# EAGLE board OBCv4 (EAGLE 9.6.2)
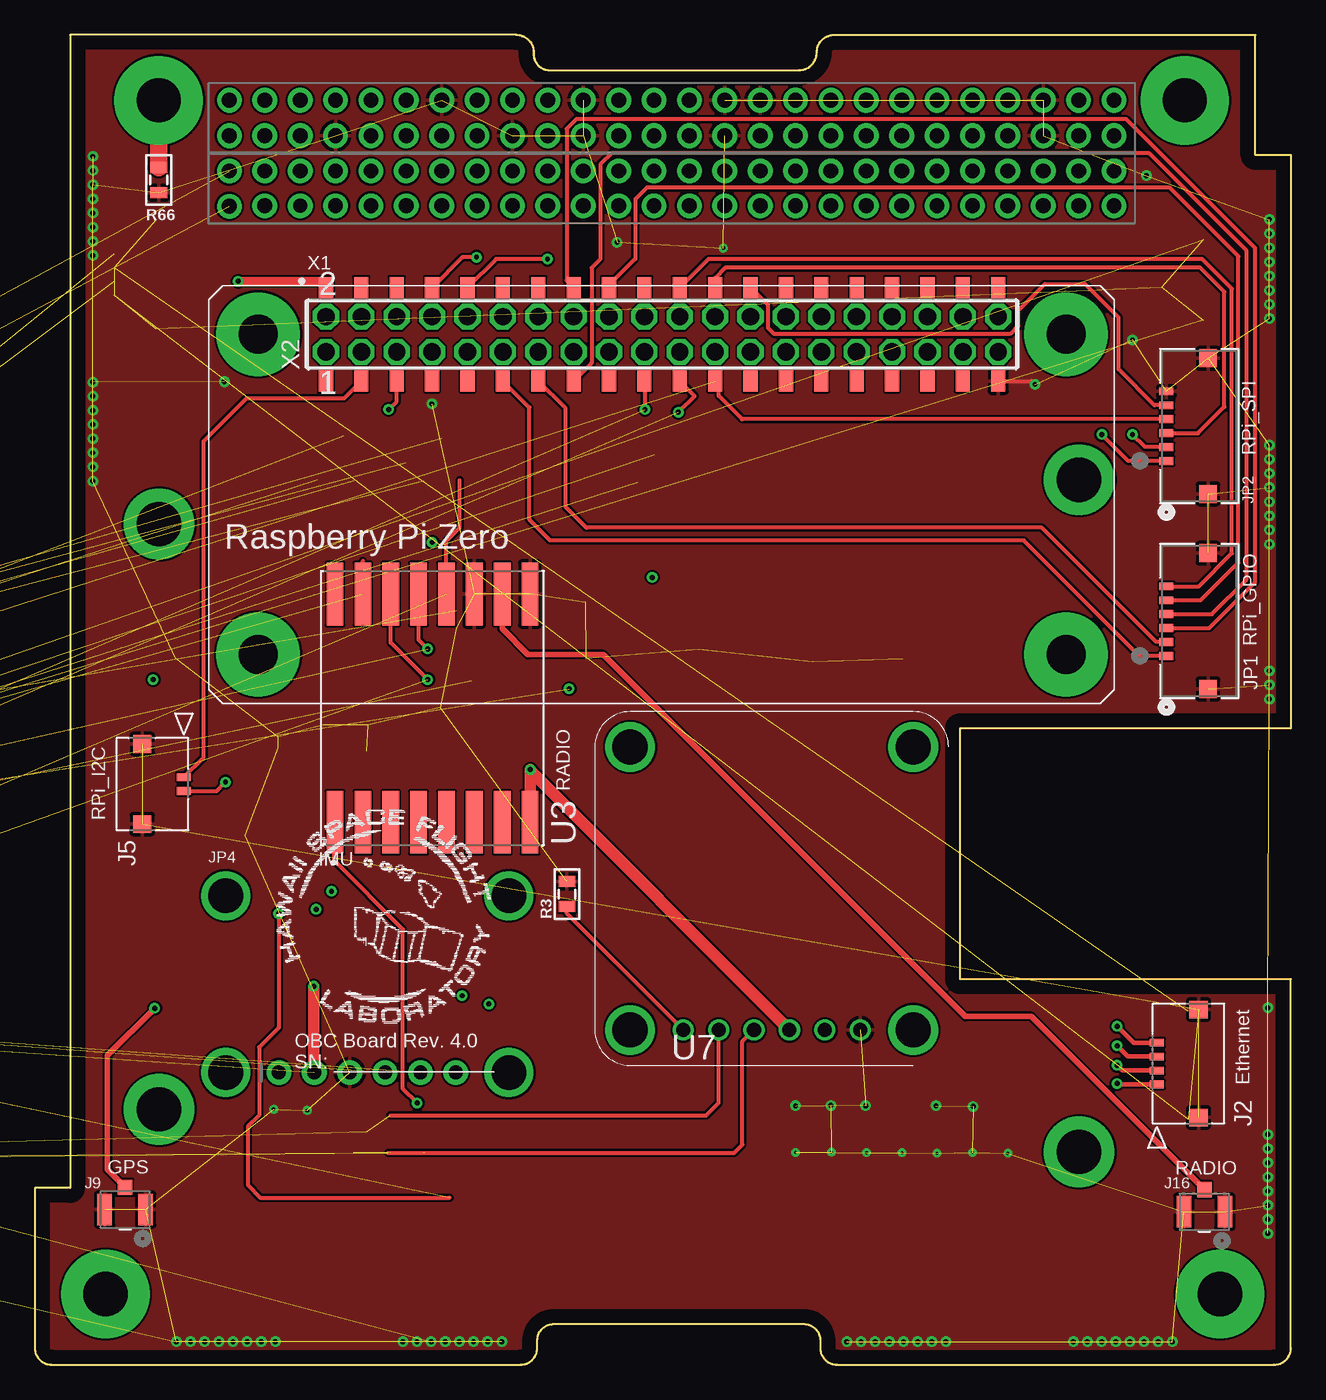
[diagram p0: board, top side]
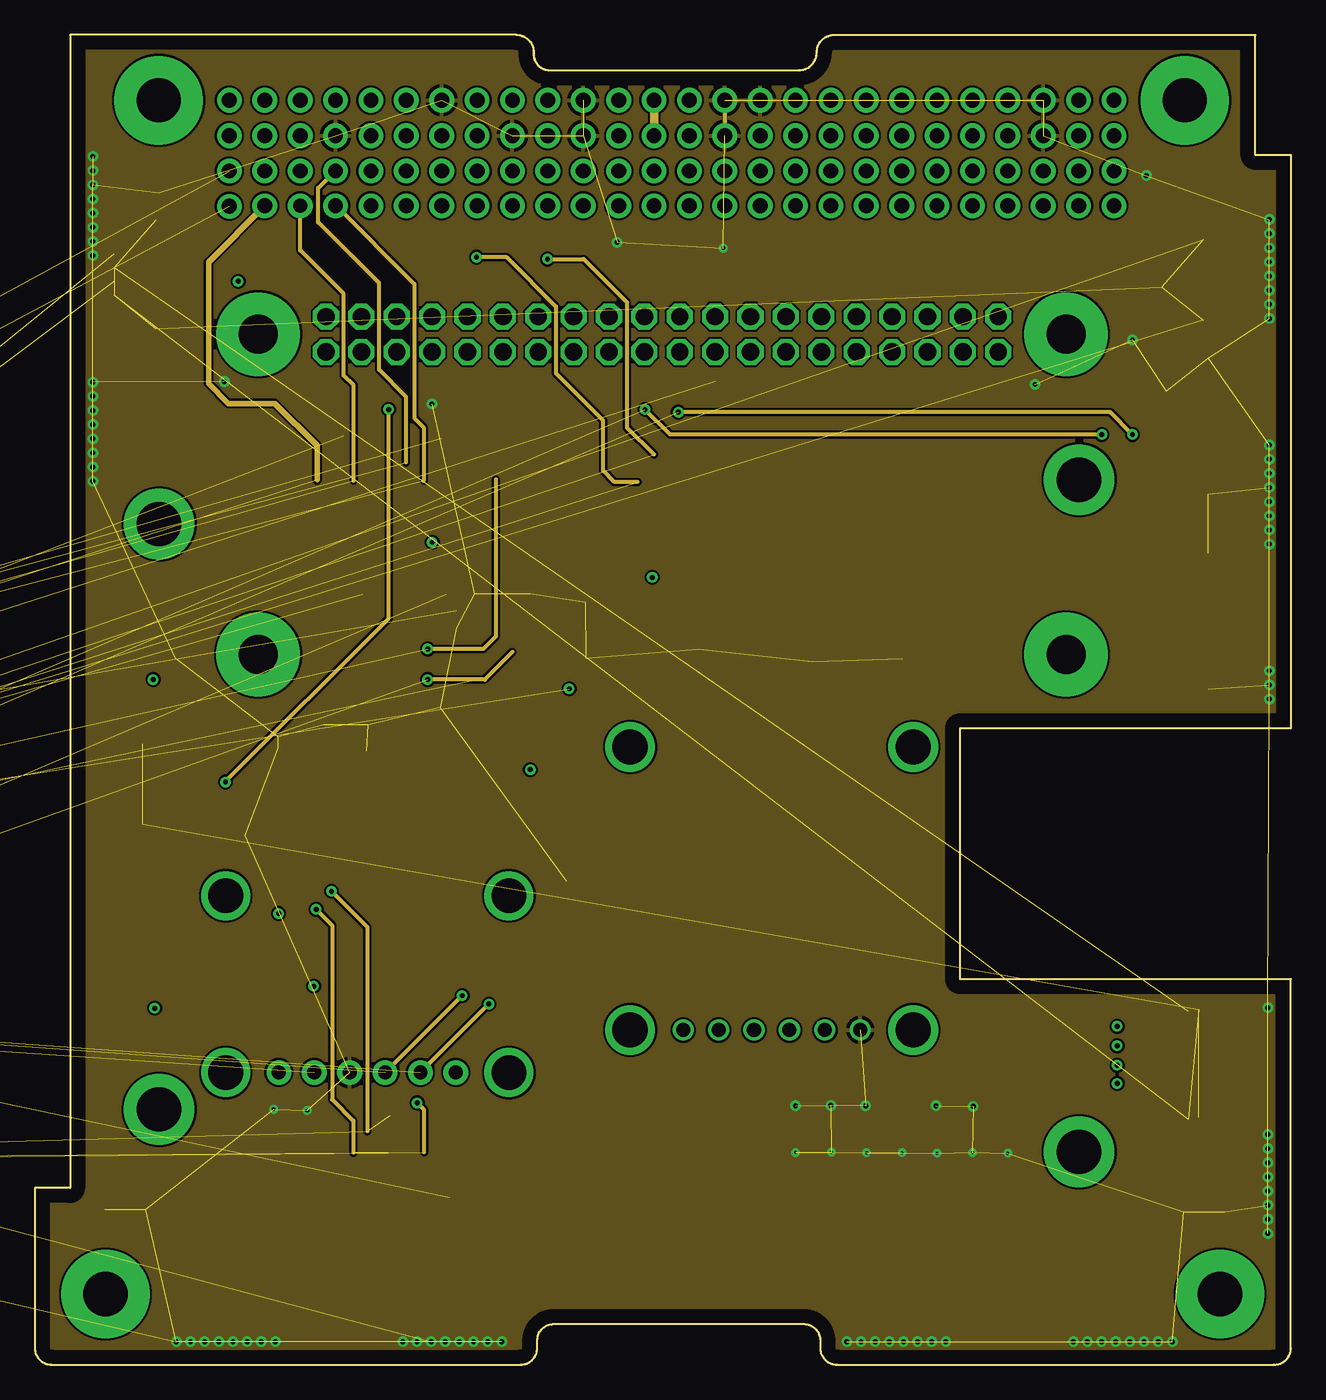
[diagram p1: board, inner layer Route2]
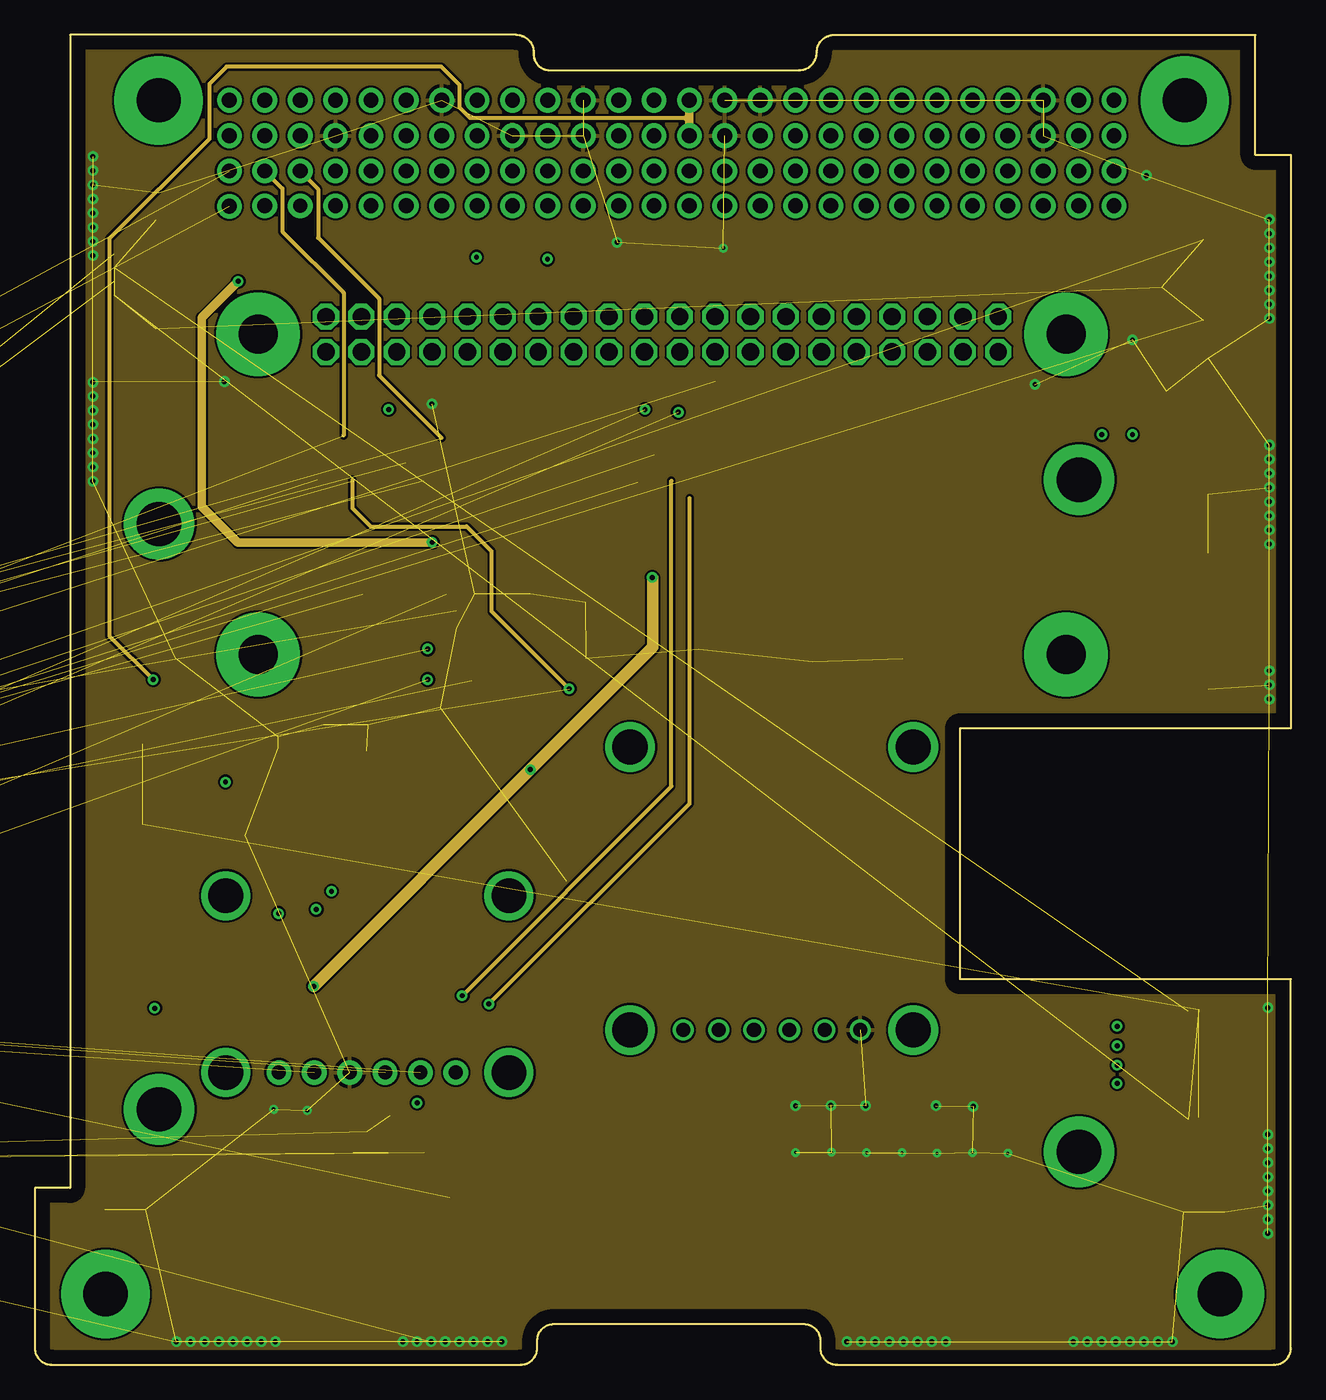
[diagram p2: board, inner layer Route15]
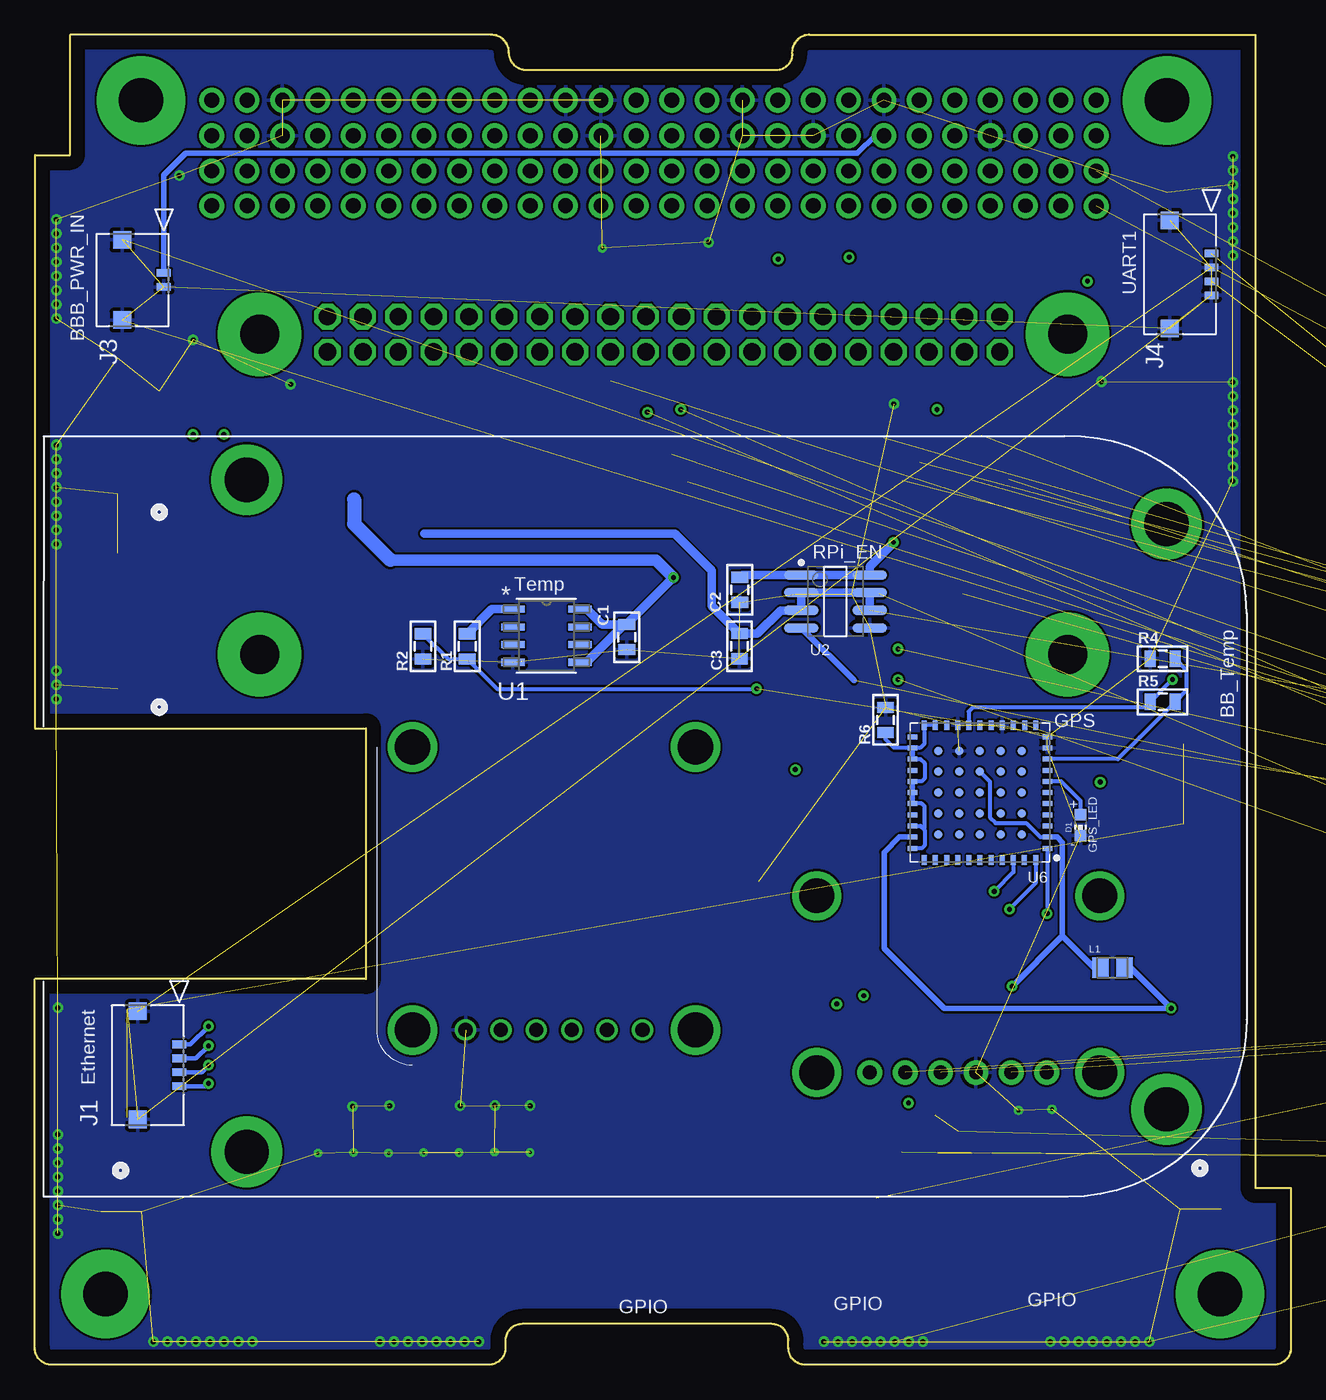
[diagram p3: board, bottom side, seen from below]

Size 90.17 x 95.5 mm. Coordinates in mm from the lower left corner, seen from the top.
Copper layers (1+2*15+16): Top 0.035mm / dielectric 1.5mm / Route2 0.035mm / dielectric 0.15mm / Route15 0.035mm / dielectric 0.2mm / Bottom 0.035mm
Design rules "default *": minimum track width 6mil, minimum drill 8mil, track to track 6mil, track to pad 6mil, pad to pad 6mil, via to via 6mil, smd to smd 6mil, copper to edge 40mil, drill to drill 6mil, minimum pad ring 10mil, minimum via ring 8mil, stop-mask expansion 4mil, vias tented up to drill 0mil, thermal gap 10mil
Net classes: 1 highpower: width 0.406 mm, drill 0.483 mm; 2 lowpower: width 0.305 mm, drill 0.483 mm

## Footprints (pad centres in the part's own frame; a part is rotated, then mirrored left to right if it is on the bottom)
0805 = smd 0.8 x 1.2: 1 -0.9,0; 2 0.9,0
CHIP-LED0603 = smd 0.8 x 0.8: A 0,-0.75; C 0,0.75
PC104_WCONN = drill 1.067 pad 1.778: 1.1 13.97,83.185; 1.2 13.97,85.725; 1.3 16.51,83.223; 1.4 16.51,85.725; 1.6 19.05,85.725; 1.7 21.59,83.223; 1.8 21.59,85.725; 1.9 24.13,83.223; 1.10 24.13,85.725; 1.11 26.67,83.223; 1.12 26.67,85.725; 1.13 29.21,83.223; 1.14 29.21,85.725; 1.15 31.75,83.223; 1.16 31.75,85.725; 1.17 34.29,83.223; 1.18 34.29,85.725; 1.19 36.83,83.223; 1.20 36.83,85.725; 1.21 39.37,83.223; 1.22 39.37,85.725; 1.23 41.91,83.223; 1.24 41.91,85.725; 1.25 44.45,83.223; 1.26 44.45,85.725; 1.27 46.99,83.223; 1.28 46.99,85.725; 1.29 49.53,83.223; 1.30 49.53,85.725; 1.31 52.07,83.223; 1.32 52.07,85.725; 1.33 54.61,83.223; 1.34 54.61,85.725; 1.35 57.15,83.223; 1.36 57.15,85.725; 1.37 59.69,83.223; 1.38 59.69,85.725; 1.39 62.23,83.223; 1.40 62.23,85.725; 1.41 64.77,83.223; 1.42 64.77,85.725; 1.43 67.31,83.223; 1.44 67.31,85.725; 1.45 69.85,83.223; 1.46 69.85,85.725; 1.47 72.39,83.223; 1.48 72.39,85.725; 1.49 74.93,83.223; 1.50 74.93,85.725; 1.51 77.47,83.223; 1.52 77.47,85.725; 2.1 13.97,88.265; 2.2 13.97,90.805; 2.3 16.51,88.265; 2.4 16.51,90.805; 2.5 19.05,88.265; 2.6 19.05,90.805; 2.7 21.59,88.265; 2.8 21.59,90.805; 2.9 24.13,88.265; 2.10 24.13,90.805; 2.11 26.67,88.265; 2.12 26.67,90.805; 2.13 29.21,88.265; 2.14 29.21,90.805; 2.15 31.75,88.265; 2.16 31.75,90.805; 2.17 34.29,88.265; 2.18 34.29,90.805; 2.19 36.83,88.265; 2.20 36.83,90.805; 2.21 39.37,88.265; 2.22 39.37,90.805; 2.23 41.91,88.265; 2.24 41.91,90.805; 2.25 44.45,88.265; 2.26 44.45,90.805; 2.27 46.99,88.265; 2.28 46.99,90.805; 2.29 49.53,88.265; 2.30 49.53,90.805; 2.31 52.07,88.265; 2.32 52.07,90.805; 2.33 54.61,88.265; 2.34 54.61,90.805; 2.35 57.15,88.265; 2.36 57.15,90.805; 2.37 59.69,88.265; 2.38 59.69,90.805; 2.39 62.23,88.265; 2.40 62.23,90.805; 2.41 64.77,88.265; 2.42 64.77,90.805; 2.43 67.31,88.265; 2.44 67.31,90.805; 2.45 69.85,88.265; 2.46 69.85,90.805; 2.47 72.39,88.265; 2.48 72.39,90.805; 2.49 74.93,88.265; 2.50 74.93,90.805; 2.51 77.47,88.265; 2.52 77.47,90.805 | drill 1.016 pad 1.778: 1.5 19.05,83.223 | drill 3.175 pad 6.35: P$1 5.08,5.08; P$2 85.09,5.08; P$3 82.55,90.805; P$4 8.89,90.805
CON_5037630491 = smd 0.55 x 1: 1 0,0; 2 -1,0; 3 -2,0; 4 -3,0 | smd 1.26 x 1.3: 5 2.375,2.99; 6 -5.38,2.99
CON_5037630291 = smd 0.55 x 1: 1 0,0; 2 -1,0 | smd 1.26 x 1.3: 3 2.375,2.99; 4 -3.38,2.99
CONN_-SMT-1(01) = smd 1.041 x 2.261: 1 -1.47,0; 2 1.47,0 | smd 1.041 x 1.092: 3 0,-1.596
CONN_503763-0691_MOL = smd 0.559 x 0.991: 1 2.5,-2.368; 2 1.5,-2.368; 3 0.5,-2.368; 4 -0.5,-2.368; 5 -1.5,-2.368; 6 -2.5,-2.368 | smd 1.295 x 1.27: 7 -4.875,0.622; 8 4.875,0.622
1X06_ROUND_70 = drill 1 pad 1.778: 1 -6.35,0; 2 -3.81,0; 3 -1.27,0; 4 1.27,0; 5 3.81,0; 6 6.35,0
INDC2012X145N = smd 1.2 x 1.47: 1 -0.86,0; 2 0.86,0
R_8_ADI-L = smd 1.676 x 0.508: 1 -2.413,1.905; 2 -2.413,0.635; 3 -2.413,-0.635; 4 -2.413,-1.905; 5 2.413,-1.905; 6 2.413,-0.635; 7 2.413,0.635; 8 2.413,1.905
LINEAR_TECHNOLOGY_LTC1477CS8_2 = smd 2.5 x 0.7: 1 -2.45,1.905; 2 -2.45,0.635; 3 -2.45,-0.635; 4 -2.45,-1.905; 5 2.45,-1.905; 6 2.45,-0.635; 7 2.45,0.635; 8 2.45,1.905
RFM69HCW_433 = smd 4.5 x 1.2: 1 8.2,7; 2 8.2,5; 3 8.2,3; 4 8.2,1; 5 8.2,-1; 6 8.2,-3; 7 8.2,-5; 8 8.2,-7; 9 -8.2,7; 10 -8.2,5; 11 -8.2,3; 12 -8.2,1; 13 -8.2,-1; 14 -8.2,-3; 15 -8.2,-5; 16 -8.2,-7
ORION_A38L = smd 0.7 x 0.36: 1 -4.84,4; 2 -4.84,3.2; 3 -4.84,2.4; 4 -4.84,1.6; 5 -4.84,0.8; 6 -4.84,0; 7 -4.84,-0.8; 8 -4.84,-1.6; 9 -4.84,-2.4; 10 -4.84,-3.2; 11 -4.84,-4; 23 4.84,-4; 24 4.84,-3.2; 25 4.84,-2.4; 26 4.84,-1.6; 27 4.84,-0.8; 28 4.84,0; 29 4.84,0.8; 30 4.84,1.6; 31 4.84,2.4; 32 4.84,3.2; 33 4.84,4 | smd 0.36 x 0.7: 12 -4,-4.84; 13 -3.2,-4.84; 14 -2.4,-4.84; 15 -1.6,-4.84; 16 -0.8,-4.84; 17 0,-4.84; 18 0.81,-4.84; 19 1.6,-4.84; 20 2.4,-4.84; 21 3.2,-4.84; 22 4,-4.84; 34 4,4.84; 35 3.2,4.84; 36 2.4,4.84; 37 1.6,4.84; 38 0.8,4.84; 39 0,4.84; 40 -0.8,4.84; 41 -1.6,4.84; 42 -2.4,4.84; 43 -3.18,4.84; 44 -4,4.84 | smd 0.6 x 0.6: 45 -3,3; 46 -3,1.5; 47 -3,0; 48 -3,-1.5; 49 -3,-3; 50 -1.5,3; 51 -1.5,1.5; 52 -1.5,0; 53 -1.5,-1.5; 54 -1.5,-3; 55 0,3; 56 0,1.5; 57 0,0; 58 0,-1.5; 59 0,-3; 60 1.5,3; 61 1.5,1.5; 62 1.5,0; 63 1.5,-1.5; 64 1.5,-3; 65 3,3; 66 3,1.5; 67 3,0; 68 3,-1.5; 69 3,-3
PA1010D = drill 1.016: 1 -6.35,10.16; 2 -3.81,10.16; 3 -1.27,10.16; 4 1.27,10.16; 5 3.81,10.16; 6 6.35,10.16 | drill 2.54: P$1 -10.16,10.16; P$2 10.16,10.16; P$3 -10.16,-10.16; P$4 10.16,-10.16
TEENSY41 = drill 1: 0-RX1/CS1/CRX2 -27.94,-7.62; 1-TX1/MISO1/CTX2 -25.4,-7.62; 2-OUT2 -22.86,-7.62; 3-LRCLK2 -20.32,-7.62; 4-BCLK2 -17.78,-7.62; 5-IN2 -15.24,-7.62; 6-OUT1D -12.7,-7.62; 7-RX2/OUT1A -10.16,-7.62; 8-TX2/IN1 -7.62,-7.62; 9-OUT1C -5.08,-7.62; 10-CS\MQSR -2.54,-7.62; 11-MOSI/CTX1 0,-7.62; 12-MISO/MQSL 2.54,-7.62; 13-SCK/LED 2.54,7.62; 14-A0/TX3/SPDIF_OUT 0,7.62; 15-A1/RX3/SPDIF_IN -2.54,7.62; 16-A2/RX4/SCL1 -5.08,7.62; 17-A3/TX4/SDA1 -7.62,7.62; 18-A4/SDA0 -10.16,7.62; 19-A5/SCL0 -12.7,7.62; 20-A6/TX5/LRCLK1 -15.24,7.62; 21-A7/RX5/BCLK1 -17.78,7.62; 22-A8/CTX1 -20.32,7.62; 23-A9/CRX1/MCLK1 -22.86,7.62; 24-A10/TX6/SCL2 7.62,-7.62; 25-A11/RX6/SDA2 10.16,-7.62; 26-A12/MOSI1 12.7,-7.62; 27-A13/SCK1 15.24,-7.62; 28-RX7 17.78,-7.62; 29-TX7 20.32,-7.62; 30-CRX3 22.86,-7.62; 31-CTX3 25.4,-7.62; 32-OUT1B 27.94,-7.62; 33-MCLK2 27.94,7.62; 34-RX8 25.4,7.62; 35-TX8 22.86,7.62; 36-PWM 20.32,7.62; 37-PWM 17.78,7.62; 38-A14/CS/IN1 15.24,7.62; 39-A15/CS/OUT1A 12.7,7.62; 40-A16/CS1 10.16,7.62; 41-A17/MISO1 7.62,7.62; +5V -24.13,-4.62; D+ -30.25,-1; D- -30.25,1; DM -21.59,-4.62; DP -19.05,-4.62; GND4 -16.51,-4.62; GND5 -13.97,-4.62; ON/OFF 15.24,5.08; PROGRAM 15.24,2.54; VBAT 15.24,-5.08; VUSB -27.94,5.08 | drill 1 octagon: 3V3-1 5.08,-7.62; 3V3-2 15.24,-2.54; 3V3-3 -25.4,7.62 | drill 0.6: G -15.51,3.08; LED -17.51,3.08; R+ -17.51,5.08; R- -15.51,5.08; T+ -15.51,1.08; T- -17.51,1.08 | drill 1 square: GND1 -30.48,-7.62; GND2 15.24,0; GND3 5.08,7.62; GND6 -27.94,7.62 | drill 1 pad 1.676: VIN -30.48,7.62
ADAFRUIT_C25582-40G-M36-0A_0 = smd 1.02 x 1.524: 1 -24.13,-3.354; 2 -24.13,3.354; 3 -21.59,-3.354; 4 -21.59,3.354; 5 -19.05,-3.354; 6 -19.05,3.354; 7 -16.51,-3.354; 8 -16.51,3.354; 9 -13.97,-3.354; 10 -13.97,3.354; 11 -11.43,-3.354; 12 -11.43,3.354; 13 -8.89,-3.354; 14 -8.89,3.354; 15 -6.35,-3.354; 16 -6.35,3.354; 17 -3.81,-3.354; 18 -3.81,3.354; 19 -1.27,-3.354; 20 -1.27,3.354; 21 1.27,-3.354; 22 1.27,3.354; 23 3.81,-3.354; 24 3.81,3.354; 25 6.35,-3.354; 26 6.35,3.354; 27 8.89,-3.354; 28 8.89,3.354; 29 11.43,-3.354; 30 11.43,3.354; 31 13.97,-3.354; 32 13.97,3.354; 33 16.51,-3.354; 34 16.51,3.354; 35 19.05,-3.354; 36 19.05,3.354; 37 21.59,-3.354; 38 21.59,3.354; 39 24.13,-3.354; 40 24.13,3.354
SSW-120-02-G-D = drill 1.25 pad 1.4 octagon: 1 -24.13,-1.27; 2 -24.13,1.27; 3 -21.59,-1.27; 4 -21.59,1.27; 5 -19.05,-1.27; 6 -19.05,1.27; 7 -16.51,-1.27; 8 -16.51,1.27; 9 -13.97,-1.27; 10 -13.97,1.27; 11 -11.43,-1.27; 12 -11.43,1.27; 13 -8.89,-1.27; 14 -8.89,1.27; 15 -6.35,-1.27; 16 -6.35,1.27; 17 -3.81,-1.27; 18 -3.81,1.27; 19 -1.27,-1.27; 20 -1.27,1.27; 21 1.27,-1.27; 22 1.27,1.27; 23 3.81,-1.27; 24 3.81,1.27; 25 6.35,-1.27; 26 6.35,1.27; 27 8.89,-1.27; 28 8.89,1.27; 29 11.43,-1.27; 30 11.43,1.27; 31 13.97,-1.27; 32 13.97,1.27; 33 16.51,-1.27; 34 16.51,1.27; 35 19.05,-1.27; 36 19.05,1.27; 37 21.59,-1.27; 38 21.59,1.27; 39 24.13,-1.27; 40 24.13,1.27

## Placement (x,y rotation side)
C1  0.1 uF  [0805]  47.68,52.25 270 bottom
C2  1 uF  [0805]  39.56,55.65 270 bottom
C3  1 uF  [0805]  39.59,51.6 270 bottom
D1  [CHIP-LED0603]  15.1,38.74 180 bottom
H1  PC104_WCONN  [PC104_WCONN]  0,0 0 top
J1  5037630491  [CON_5037630491]  79.8,23 90 bottom
J2  5037630491  [CON_5037630491]  80.55,20.13 270 top
J3  5037630291  [CON_5037630291]  80.9,78.4 90 bottom
J4  5037630491  [CON_5037630491]  5.7,79.8 90 bottom
J5  5037630291  [CON_5037630291]  10.7,42.2 90 top
J9  U.FL-R-SMT-1(01)  [CONN_-SMT-1(01)]  6.48,11.14 180 top
J16  U.FL-R-SMT-1(01)  [CONN_-SMT-1(01)]  83.96,10.98 180 top
JP1  503763-0691  [CONN_503763-0691_MOL]  83.6,53.4 270 top
JP2  503763-0691  [CONN_503763-0691_MOL]  83.6,67.4 270 top
JP4  [1X06_ROUND_70]  23.88,20.98 0 top
L1  L  [INDC2012X145N]  12.8,28.5 0 bottom
R1  45.3k  [0805]  59.13,51.59 90 bottom
R2  10k  [0805]  62.31,51.59 90 bottom
R3  10k  [0805]  38.2,33.8 90 top
R4  0  [0805]  9.2,50.7 0 bottom
R5  0  [0805]  9.2,47.6 0 bottom
R6  0  [0805]  29.1,46.3 90 bottom
R66  1M  [0805]  8.89,85.07 270 top
U1  TMP36FSZR_8_ADI-L  [R_8_ADI-L]  53.44,52.35 0 bottom
U2  LTC1477CS8LINEAR_TECHNOLOGY_LTC1477CS8_0_2  [LINEAR_TECHNOLOGY_LTC1477CS8_2]  32.7,54.81 0 bottom
U3  RFM69HCW_433_900  [RFM69HCW_433]  28.55,47.15 90 top
U6  ORION_A38LORION_A38L  [ORION_A38L]  22.32,41.09 180 bottom
U7  PA1010D  [PA1010D]  52.9,34.2 180 top
U$1  TEENSY41  [TEENSY41]  -81.5,22 0 top  (outside the outline)
X1  C25582-40G-M36-0A  [ADAFRUIT_C25582-40G-M36-0A_0]  45.03,74 0 top
X2  SSW-120-02-G-D  [SSW-120-02-G-D]  45.03,74 0 top

## Library data of the parts
C1-C3 H1 R1-R6 R66 = HSFL_Main_Library
D1 = led
J1 J2 J4 = OBCv4; BUILT_BY: Molex_Team; COPYRIGHT: Copyright (C) 2018 Accelerated Designs. All rights reserved; MANUFACTURER_PART_NUMBER: 5037630491; SOURCELIBRARY: Add_to_database_2021-03-17; VENDOR: Molex Connector Corporation
J3 J5 = OBCv4; BUILT_BY: Molex_Team; COPYRIGHT: Copyright (C) 2018 Accelerated Designs. All rights reserved; MANUFACTURER_PART_NUMBER: 5037630291; SOURCELIBRARY: Add_to_database_2021-03-17; VENDOR: Molex Connector Corporation
J9 J16 = U.FL-R-SMT; BUILT_BY: EMA_Matt; COPYRIGHT: Copyright (C) 2018 Accelerated Designs. All rights reserved; MANUFACTURER_PART_NUMBER: U.FL-R-SMT-1(01); SOURCELIBRARY: Hirose_12_20_2019; VENDOR: Hirose
JP1 JP2 = Improved Molex 503763-0691; BUILT_BY: EMA_Cory; COPYRIGHT: Copyright (C) 2018 Accelerated Designs. All rights reserved; DATASHEET: https://www.digikey.com/products/en?keywords=503763-0691; MANUFACTURER_PART_NUMBER: 503763-0691; SOURCELIBRARY: Molex_2020-01-22; VENDOR: Molex Connector Corporation
JP4 = microbuilder
L1 = L; DESCRIPTION: Inductor with Inductance: 10uH Tol. +/-20%, Package: 0805 (2012); DIGI-KEY_PART_NUMBER: 490-18463-1-ND; MF: Murata Electronics North America; MP: LQM21DH100M70L; PACKAGE: 2012 Bourns
U1 = TMP36FSZR_8; COPYRIGHT: Copyright (C) 2021 Ultra Librarian. All rights reserved.; MANUFACTURER_PART_NUMBER: TMP36FSZ; MFR_NAME: Analog Devices Inc
U2 = Artemis; CIIVA_IDS: 1432281; COMPONENT_LINK_1_DESCRIPTION: Manufacturer URL; COMPONENT_LINK_1_URL: http://www.linear.com/; COMPONENT_LINK_3_DESCRIPTION: Package Specification; COMPONENT_LINK_3_URL: http://cds.linear.com/docs/en/packaging/05081610_G_SO8.pdf; DATASHEET: http://cds.linear.com/docs/en/datasheet/lt1477.pdf; FOOTPRINT_VARIANT_NAME_0: Level C; FOOTPRINT_VARIANT_NAME_1: Level B; FOOTPRINT_VARIANT_NAME_2: Level A; IMPORTED: yes; IMPORTED_FROM: vault; IMPORT_TS: 1521843574; MF: Linear Technology; MOUNTING_TECHNOLOGY: Surface Mount; MPN: LTC1477CS8; PACKAGE: S8-8; PACKAGE_DESCRIPTION: 8-Pin Plastic Small Outline (Narrow .150 Inch), Body 4.9 x 3.9 mm, Pitch 1.27 mm; PACKAGE_VERSION: Rev. G, 03/2012; PREFIX: U; RELEASE_DATE: 1377817843; ROHS: No; VAULT_GUID: 635B2D7C-EC07-409E-A57F-666E02CD64AC; VAULT_REVISION: 6B8B57C2-2CB3-4970-A31A-1EB58B636423
U3 = RFM69HCW
U6 = Artemis
U7 = Adafruit PA1010D Mini GPS
U$1 = OBCv4
X1 = Adafruit - C25582-40G-M36-0A
X2 = con-samtec-edited; MF: Samtec Inc.; MPN: SSW-120-02-G-D; OC_FARNELL: unknown; OC_NEWARK: 11P9639

## Nets
3V3_BUS: H1.2.27 H1.2.28 R5.1 U6.18
5V_BUS: H1.2.25 H1.2.26
+3V3_VCC: C1.1 JP4.2 L1.1 U1.5 U1.8 U3.16 U6.2 U6.58 U7.3 U$1.3V3-1 U$1.3V3-3
+5V_VCC: C3.1 U2.2 U2.3 U2.6 U2.7 U$1.+5V U$1.VIN
AIN0: R1.1 R2.2 U$1.14-A0/TX3/SPDIF_OUT
AIN1: H1.1.3 U$1.15-A1/RX3/SPDIF_IN
AIN2: H1.1.4 U$1.41-A17/MISO1
AIN3: H1.1.5 U$1.20-A6/TX5/LRCLK1
AIN4: H1.1.6 U$1.21-A7/RX5/BCLK1
AIN5: H1.1.7 U$1.22-A8/CTX1
AIN6: H1.1.8 U$1.23-A9/CRX1/MCLK1
GND: C1.2 C2.2 C3.2 D1.C H1.2.7 H1.2.14 H1.2.17 H1.2.21 H1.2.22 H1.2.29 H1.2.30 H1.2.32 H1.2.47 H1.2.48 J1.5 J1.6 J2.5 J2.6 J3.2 J3.3 J3.4 J4.2 J4.4 J4.5 J4.6 J5.3 J5.4 J9.1 J9.2 J16.1 J16.2 JP1.7 JP1.8 JP2.6 JP2.7 JP2.8 JP4.3 R2.1 R3.2 R4.1 R6.2 R66.2 U1.4 U2.5 U3.6 U3.8 U6.10 U6.11 U6.15 U6.19 U6.64 U7.1 U$1.GND1 U$1.GND2 U$1.GND3 U$1.GND4 U$1.GND5 U$1.GND6 X1.39
GPIO17: JP1.1 X1.11
GPIO22: JP1.4 X1.15
GPIO23: JP1.3 X1.16
GPIO24: JP1.5 X1.18
GPIO25: JP1.6 X1.22
GPIO27: JP1.2 X1.13
GPS_RSTN: U6.1 U$1.33-MCLK2
I2C1_SCL: U$1.24-A10/TX6/SCL2
I2C1_SDA: U$1.25-A11/RX6/SDA2
I2C2_SCL: JP4.4 U$1.19-A5/SCL0
I2C2_SDA: JP4.5 U$1.18-A4/SDA0
INTM: JP4.6
N$12: J16.3 U3.7
N$15: R1.2 U1.1
N$16: R4.2 R5.2 U6.9
N$17: J9.3 L1.2 U6.32
N$19: U$1.3V3-2
N$20: R3.1 U7.6
N$21: D1.A U6.7
N$94: H1.P$4 R66.1
RADIO_RESET: U3.9 U$1.7-RX2/OUT1A
RF_GND: R6.1 U6.21 U6.22 U6.24 U6.25 U6.27 U6.28 U6.29 U6.31 U6.33
RPI_5V_PWR_IN: C2.1 U2.1 U2.8 X1.2
RPI_ENABLE: U2.4 U$1.36-PWM
RX+: J1.3 J2.2
RX-: J1.4 J2.1
SCL1_I2C: J5.2 X1.5
SDA1_I2C: J5.1 X1.3
SPI0_CE0_N: JP2.3 X1.24
SPI0_CE1_N: JP2.5 X1.26
SPI0_MISO: JP2.2 U$1.12-MISO/MQSL X1.21
SPI0_MOSI: JP2.1 U$1.11-MOSI/CTX1 X1.19
SPI0_SCLK: JP2.4 U$1.13-SCK/LED X1.23
SPI1_CS1: U3.2 U$1.38-A14/CS/IN1
SPI1_D0: U3.4 U$1.39-A15/CS/OUT1A
SPI1_D1: U3.3 U$1.26-A12/MOSI1
SPI1_SCLK: U3.5 U$1.27-A13/SCK1
SW_5V_1: H1.2.13 J3.1
T_CS: U$1.10-CS\MQSR
T_GPIO2: U$1.2-OUT2
T_GPIO3: U$1.3-LRCLK2
T_GPIO4: U$1.4-BCLK2
T_GPIO5: U$1.5-IN2
T_GPIO6: U$1.6-OUT1D
TX+: J1.1 J2.4
TX-: J1.2 J2.3
UART1_RXD: J4.1 U$1.34-RX8
UART1_TXD: J4.3 U$1.35-TX8
UART2_RXD: U$1.0-RX1/CS1/CRX2 X1.8
UART2_TXD: U$1.1-TX1/MISO1/CTX2 X1.10
UART4_RXD: H1.1.1 U$1.16-A2/RX4/SCL1
UART4_TXD: H1.1.2 U$1.17-A3/TX4/SDA1
UART5_RXD: U6.44 U7.4 U$1.28-RX7
UART5_TXD: U6.42 U7.5 U$1.29-TX7

## Tracks (layer width: path | path; a pad name or v marks a point on that pad's centre or on a via)
3V3_BUS  (via drill 0.35)
  Route15 0.305: 46.88,89.52 31.25,89.52 30.49,90.28 30.49,91.89 29.16,93.22 13.77,93.22 12.52,91.97 12.52,88.01 5.36,80.85 5.36,52.34 v8.5,49.2
  Route15 0.61: H1.2.28 46.99,89.64 | 46.99,89.64 H1.2.27 | 46.99,89.64 46.88,89.52
  Bottom 0.305: U6.18 23.13,46.9 22.82,47.2 10.5,47.2 R5.1 v8.5,49.2
5V_BUS
  Route2 0.61: H1.2.26 H1.2.25
+3V3_VCC  (via drill 0.35)  (2 unrouted)
  Top 0.813: v20.02,27.18 20.02,21.03 JP4.2 | U3.16 35.55,42.66 | v35.57,42.73 35.55,42.71 35.55,42.66 | U7.3 35.55,42.66
  Route15 0.508: 44.37,56.49 v44.32,56.54
  Route15 0.813: 44.37,56.49 44.37,51.54 v35.57,42.73 v20.02,27.18
  Bottom 0.305: U6.58 21.6,41.87 21.6,39.3 21.2,38.9 19,38.9 17.99,37.89 U6.2
  Bottom 0.406: U6.2 16.79,37.89 16.4,37.5 16.4,30.79 | 16.4,30.79 v20.02,27.18 | 16.4,30.79 14.11,28.5 L1.1
  Bottom 0.61: C1.1 47.68,53.19 v44.32,56.54 | C1.1 49.45,53.15 50.56,54.25 U1.8 | C1.1 47.86,53.15 50.56,50.44 U1.5
  Bottom 0.813: 64.65,57.8 45.58,57.8 v44.32,56.54
  Bottom 1.016: 67.24,62.16 67.24,60.38 64.65,57.8
+5V_VCC  (2 unrouted)
  Bottom 0.61: 62.23,59.69 44.25,59.69 41.58,57.02 41.58,54.49 C3.1 38.31,52.5 36.63,54.18 U2.3 U2.2 U2.7 U2.6
AIN0  (via drill 0.35)  (1 unrouted)
  Route15 0.305: 22.8,63.56 22.8,61.5 24.1,60.2 31,60.2 32.8,58.4 32.8,54.1 v38.36,48.54
  Bottom 0.305: R2.2 60.51,50.69 R1.1 56.98,48.54 v38.36,48.54
AIN1  (1 unrouted)
  Route2 0.406: 20.27,63.55 20.27,65.99 17.22,69.04 13.9,69.04 12.47,70.46 12.47,79.18 H1.1.3
AIN2  (1 unrouted)
  Route15 0.305: H1.1.4 17.78,84.45 17.78,81.38 22.18,76.98 22.18,66.72
AIN3  (1 unrouted)
  Route2 0.305: H1.1.5 19.05,80.03 22.18,76.91 22.18,71.04 22.89,70.33 22.89,63.48
AIN4  (1 unrouted)
  Route15 0.305: H1.1.6 20.34,84.43 20.34,80.92 24.71,76.56 24.71,71.05 29.21,66.55
AIN5  (1 unrouted)
  Route2 0.305: 21.63,83.22 27.24,77.61 27.24,67.99 27.91,67.31 27.91,63.48
  Route2 0.406: H1.1.7 21.63,83.22
AIN6  (1 unrouted)
  Route2 0.305: 26.64,64.8 26.64,69.52 24.71,71.45 24.71,77.67 20.34,82.04 20.34,84.51 21.57,85.72
  Route2 0.406: 21.57,85.72 H1.1.8
GND  (via drill 0.2 pad 0.41, 0.25, 0.35)  (153 unrouted)
  Top 0.305: X1.39 71.56,70.64 v71.8,70.4
  Route2 0.305: H1.2.30 H1.2.29
  other vias: 54.61,18.59 57.15,18.62 59.64,18.59 64.69,18.59 67.36,18.54 10.16,1.65 12.19,1.65 13.21,1.65 14.22,1.65 15.24,1.65 16.26,1.65 17.27,1.65 11.18,1.65 26.42,1.65 27.43,1.65 28.45,1.65 29.46,1.65 30.48,1.65 31.5,1.65 32.51,1.65 33.53,1.65 4.17,79.65 4.17,81.69 4.17,82.7 4.17,83.72 4.17,84.73 4.17,85.75 4.17,86.77 4.17,80.67 4.17,63.45 4.17,65.48 4.17,66.5 4.17,67.51 4.17,68.53 4.17,69.55 4.17,70.56 4.17,64.47 58.29,1.65 60.33,1.65 61.34,1.65 62.36,1.65 63.37,1.65 64.39,1.65 65.41,1.65 59.31,1.65 74.55,1.65 75.56,1.65 76.58,1.65 77.6,1.65 78.61,1.65 79.63,1.65 80.64,1.65 81.66,1.65 19.56,18.26 17.14,18.34 54.61,15.24 49.43,80.19 88.52,25.63 88.52,9.42 88.52,11.46 88.52,12.47 88.52,13.49 88.52,14.5 88.52,15.52 88.52,16.54 88.52,10.44 88.62,58.93 88.62,60.96 88.62,61.98 88.62,62.99 88.62,64.01 88.62,65.02 88.62,66.04 88.62,59.94 88.62,47.8 88.62,48.82 88.62,49.83 88.62,75.13 88.62,77.17 88.62,78.18 88.62,79.2 88.62,80.21 88.62,81.23 88.62,82.25 88.62,76.15 57.18,15.27 59.72,15.21 62.26,15.21 64.77,15.19 67.31,15.24 69.85,15.19 13.6,70.6 28.5,69 78.8,73.6 41.8,80.6 79.8,85.4
  pour Top: 92.52,-5.29 92.52,98.21 -4.78,98.21 -4.78,-5.29
  pour Bottom: -5.78,98.91 -5.78,-6.19 93.22,-6.19 93.22,98.91
  pour Route2: 93.4,98.2 0.6,98.2 -3,98.2 -3,-5.8 93.4,-5.8
  pour Route15: 91.4,97 -3.8,97 -3.8,-3.2 91.4,-3.2
GPIO17
  Top 0.305: JP1.1 79.3,50.9 71,59.2 37,59.2 35.5,60.7 35.5,68.74 X1.11
GPIO22
  Top 0.305: JP1.4 84.5,53.9 87,56.4 87,80 80,87 41.4,87 40.6,86.2 40.6,79.4 39.98,78.78 39.98,71.94 X1.15
GPIO23
  Top 0.305: JP1.3 84.3,52.9 87.6,56.2 87.6,80.2 78.34,89.46 38.88,89.46 38.18,88.76 38.18,77.86 X1.16
GPIO24
  Top 0.305: JP1.5 83.7,54.9 86.4,57.6 86.4,79.6 81.47,84.53 43.93,84.53 43.1,83.7 43.1,79.43 41.22,77.54 X1.18
GPIO25
  Top 0.305: JP1.6 83.56,55.9 85.94,58.28 85.94,77.26 83.8,79.4 48.35,79.4 X1.22
GPIO27
  Top 0.305: JP1.2 80.5,51.9 78.15,54.25 78,54.4 72.3,60.1 39.6,60.1 38.1,61.6 38.1,68.68 X1.13 36.14,70.06
GPS_RSTN  (via drill 0.35)  (1 unrouted)
  Top 0.305: v17.5,32.4 17.5,24.2 16.1,22.8 16.1,17.9 15.3,17.1 15.3,12.9 16.2,12 29.78,12
  Bottom 0.305: U6.1 17.48,32.42 v17.5,32.4
I2C2_SCL  (via drill 0.35)  (1 unrouted)
  Route2 0.305: JP4.4 30.67,26.5 v30.68,26.5
  Route15 0.305: v30.68,26.5 45.7,41.52 45.7,63.48
I2C2_SDA  (via drill 0.35)  (1 unrouted)
  Route2 0.305: JP4.5 v32.6,25.89 v32.6,25.9
  Route15 0.305: v32.6,25.9 47,40.3 47,62.22
N$1  (via drill 2.5 pad 3.5)
  other vias: 13.72,33.68
N$2  (via drill 2.8 pad 6)
  other vias: 16.03,51
N$3  (via drill 2.5 pad 3.5)
  other vias: 34.04,20.98
N$4  (via drill 2.5 pad 3.5)
  other vias: 34.04,33.68
N$5  (via drill 3.17 pad 5.08)
  other vias: 74.96,15.29
N$6  (via drill 3.17 pad 5.08)
  other vias: 74.96,63.55
N$7  (via drill 3.17 pad 5.08)
  other vias: 8.92,18.34
N$8  (via drill 3.17 pad 5.08)
  other vias: 8.92,60.37
N$9  (via drill 2.8 pad 6)
  other vias: 16.03,74
N$10  (via drill 2.8 pad 6)
  other vias: 74.03,51
N$11  (via drill 2.8 pad 6)
  other vias: 74.03,74
N$12
  Top 0.406: U3.7 33.55,52.85 35.4,51 40.8,51 66.8,25 71.54,25 J16.3
N$14  (via drill 2.5 pad 3.5)
  other vias: 13.72,20.98
N$15
  Bottom 0.61: R1.2 57.36,54.25 U1.1
N$16
  Bottom 0.305: R4.2 7.5,49.9 7.5,48.4 R5.2 10.85,45.05 10.9,45 12.41,43.49 U6.9
N$17  (via drill 0.35)
  Top 0.406: v8.6,25.6 5.2,22.2 5.2,14.02 J9.3
  Bottom 0.406: U6.32 28.11,37.89 29.2,36.8 29.2,29.9 24.9,25.6 v8.6,25.6 11.5,28.5 L1.2
N$20
  Top 0.305: U7.6 38.2,32.39 R3.1
N$21
  Bottom 0.305: D1.A 15.1,40.5 16.5,41.9 17.47,41.9 U6.7
N$94
  Top 1.27: H1.P$4 8.91,85.99 R66.1
RADIO_RESET  (via drill 0.35)  (1 unrouted)
  Top 0.305: v27.45,18.8 26.43,19.82 26.43,31.27 21.5,36.2 21.5,38.9 U3.9
  Route2 0.305: v27.45,18.8 27.95,18.3 27.95,15.25
RF_GND
  Bottom 0.305: U6.21 U6.22 26.32,44.58 26.61,44.29 U6.24 | U6.24 U6.25 26.59,43.49 26.3,43.2 26.3,42.1 26.51,41.89 U6.27 U6.28 U6.29 27.15,40.3 26.5,40.3 26.3,40.1 26.3,38.4 | U6.31 26.59,38.69 26.3,38.4 | 26.3,38.4 26.3,37.3 26.51,37.09 U6.33 | U6.24 28.49,44.29 29.1,44.9 R6.1
RPI_5V_PWR_IN  (via drill 0.35)
  Top 0.61: v14.6,77.8 20.45,77.8 X1.2
  Route15 0.61: v14.6,77.8 12,75.2 12,61.63 14.58,59.05 v28.52,59.05
  Bottom 0.61: v28.52,59.05 30.25,57.33 U2.8 U2.1 39.39,56.72 C2.1
RPI_ENABLE  (1 unrouted)
  Bottom 0.406: U2.4 31.36,49.12
RX+  (via drill 0.35)
  Top 0.32: v77.7,21.5 78.07,21.13 J2.2
  Bottom 0.32: J1.3 78.2,21 v77.7,21.5
RX-  (via drill 0.35)
  Top 0.32: v77.7,20.2 77.77,20.13 J2.1
  Bottom 0.32: J1.4 77.9,20 v77.7,20.2
SCL1_I2C  (via drill 0.35)
  Top 0.305: v13.69,41.84 13.05,41.2 J5.2 | v25.4,68.6 25.98,69.18 X1.5
  Route2 0.305: v13.69,41.84 13.69,41.87 25.4,53.59 v25.4,68.6
SDA1_I2C
  Top 0.305: X1.3 22.2,69.4 15.2,69.4 12.12,66.32 12.12,43.62 J5.1
SPI0_CE0_N
  Top 0.305: JP2.3 83.5,66.9 85.4,68.8 85.4,77.05 83.67,78.78 49.58,78.78 48.84,78.04 X1.24
SPI0_CE1_N
  Top 0.305: JP2.5 80.38,68.9 77.8,71.48 77.8,75.2 75.4,77.6 72.5,77.6 70.6,75.7 70.6,74.61 70.01,74.02 53.07,74.02 52.64,74.45 52.64,76.09 X1.26
SPI0_MISO  (via drill 0.35)  (1 unrouted)
  Top 0.305: JP2.2 79.7,65.9 v78.8,66.8 | X1.21 47.37,69.57 v46.2,68.4
  Route2 0.305: v78.8,66.8 77.2,68.4 v46.2,68.4
SPI0_MOSI  (via drill 0.35)  (1 unrouted)
  Top 0.305: JP2.1 78.5,64.9 v76.6,66.8 | X1.19 43.8,70.6 v43.8,68.6
  Route2 0.305: v76.6,66.8 45.6,66.8 v43.8,68.6
SPI0_SCLK  (1 unrouted)
  Top 0.305: JP2.4 50.77,67.9 49.08,69.59 49.08,70.64 X1.23
SPI1_CS1  (1 unrouted)
  Top 0.305: U3.2 23.55,57.73
SPI1_D0  (via drill 0.35)  (1 unrouted)
  Top 0.305: v28.2,51.4 27.55,52.05 U3.4
  Route2 0.305: 33.1,63.58 33.1,52.3 32.2,51.4 v28.2,51.4
SPI1_D1  (via drill 0.35)  (1 unrouted)
  Top 0.305: v28.2,49.2 25.55,51.85 U3.3
  Route2 0.305: 34.29,51.19 32.3,49.2 v28.2,49.2
SPI1_SCLK  (1 unrouted)
  Top 0.305: U3.5 29.55,59.15 30.5,60.1 30.5,63.52
SW_5V_1
  Bottom 0.406: H1.2.13 29.84,88.27 31.11,87 79.35,87 80.92,85.42 80.92,78.42 J3.1
TX+  (via drill 0.35)
  Top 0.32: v77.7,24.3 78.87,23.13 J2.4
  Bottom 0.32: J1.1 79,23 v77.7,24.3
TX-  (via drill 0.35)
  Top 0.32: v77.7,22.9 78.47,22.13 J2.3
  Bottom 0.32: J1.2 78.6,22 v77.7,22.9
UART1_RXD  (1 unrouted)
UART1_TXD  (1 unrouted)
UART2_RXD  (via drill 0.35)  (1 unrouted)
  Top 0.305: v31.71,79.53 30.7,79.53 X1.8
  Route2 0.305: 43.28,63.4 41.6,63.4 40.8,64.2 40.8,67.8 37.4,71.2 37.4,76 33.87,79.53 v31.71,79.53
UART2_TXD  (via drill 0.35)  (1 unrouted)
  Top 0.305: v36.8,79.4 33.11,79.4 X1.10
  Route2 0.305: 44.45,65.37 42.51,67.31 42.51,76.29 39.4,79.4 v36.8,79.4
UART4_RXD  (1 unrouted)
UART4_TXD  (1 unrouted)
UART5_RXD  (via drill 0.35)  (2 unrouted)
  Top 0.305: U7.4 50.8,23.21 50.8,15.8 50.2,15.2 25.36,15.2
  Route2 0.305: v20.2,32.7 21.35,31.55 21.35,19.05 22.88,17.52 22.88,15.22
  Bottom 0.305: U6.44 18.32,34.58 v20.2,32.7
UART5_TXD  (via drill 0.35)  (2 unrouted)
  Top 0.305: 25.52,17.9 48.2,17.9 49.09,18.79 U7.5
  Route2 0.305: v21.3,34 23.87,31.43 23.87,16.77
  Bottom 0.305: U6.42 19.92,35.38 v21.3,34

## Text on the board
tPlace: Raspberry Pi Zero
bPlace: + | -
tNames: RPi_SPI | RPi_GPIO | RADIO | RPi_I2C | IMU | U7 | OBC Board Rev. 4.0 / SN: ______________ | Ethernet | RADIO | GPS
bNames: BBB_PWR_IN | UART1 | RPi_EN | Temp | BB_Temp | GPS | GPS_LED | Ethernet | GPIO | GPIO | GPIO